# Altium PCB final test with protection.PcbDoc
Units mm, origin at the board's own origin, x right, y up, seen from the top; angles counter-clockwise.
Board outline 152.4 x 101.6 mm, 2 copper layers (Top Layer, Bottom Layer); 17 components, 18 nets, 72 pads, 0 vias.
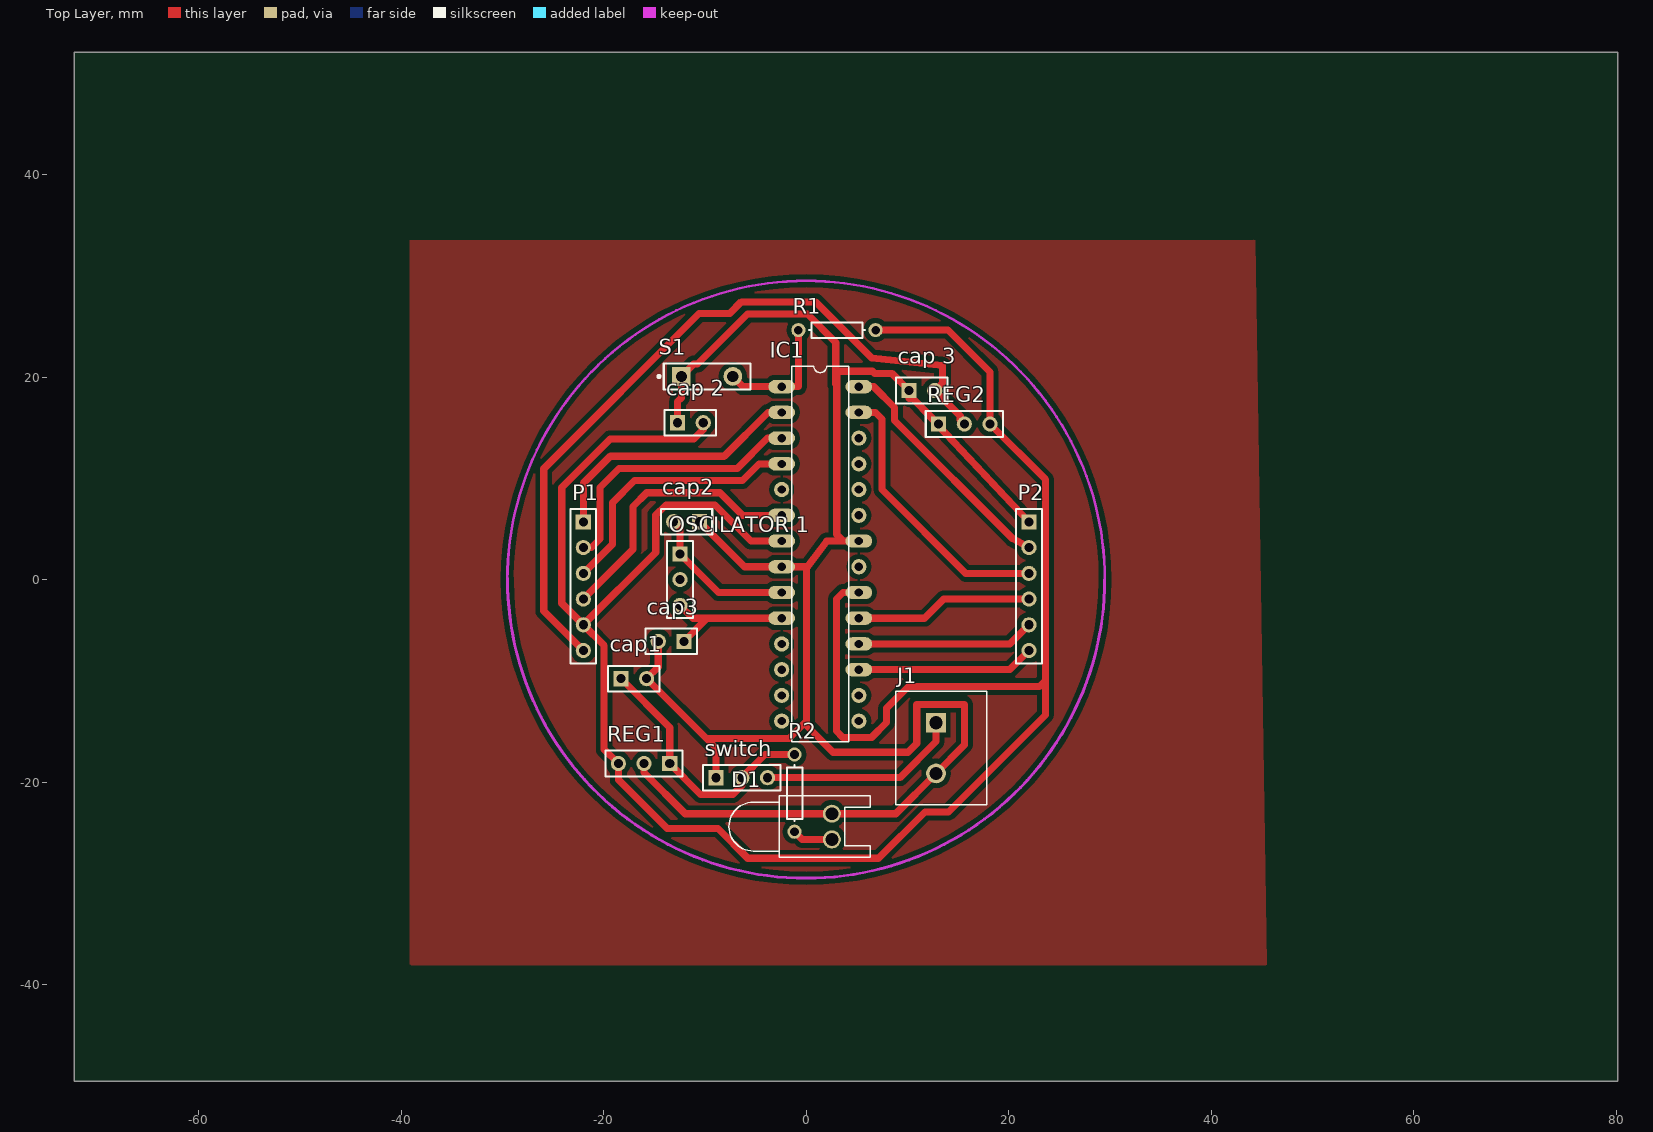
[diagram p0: Top Layer view]
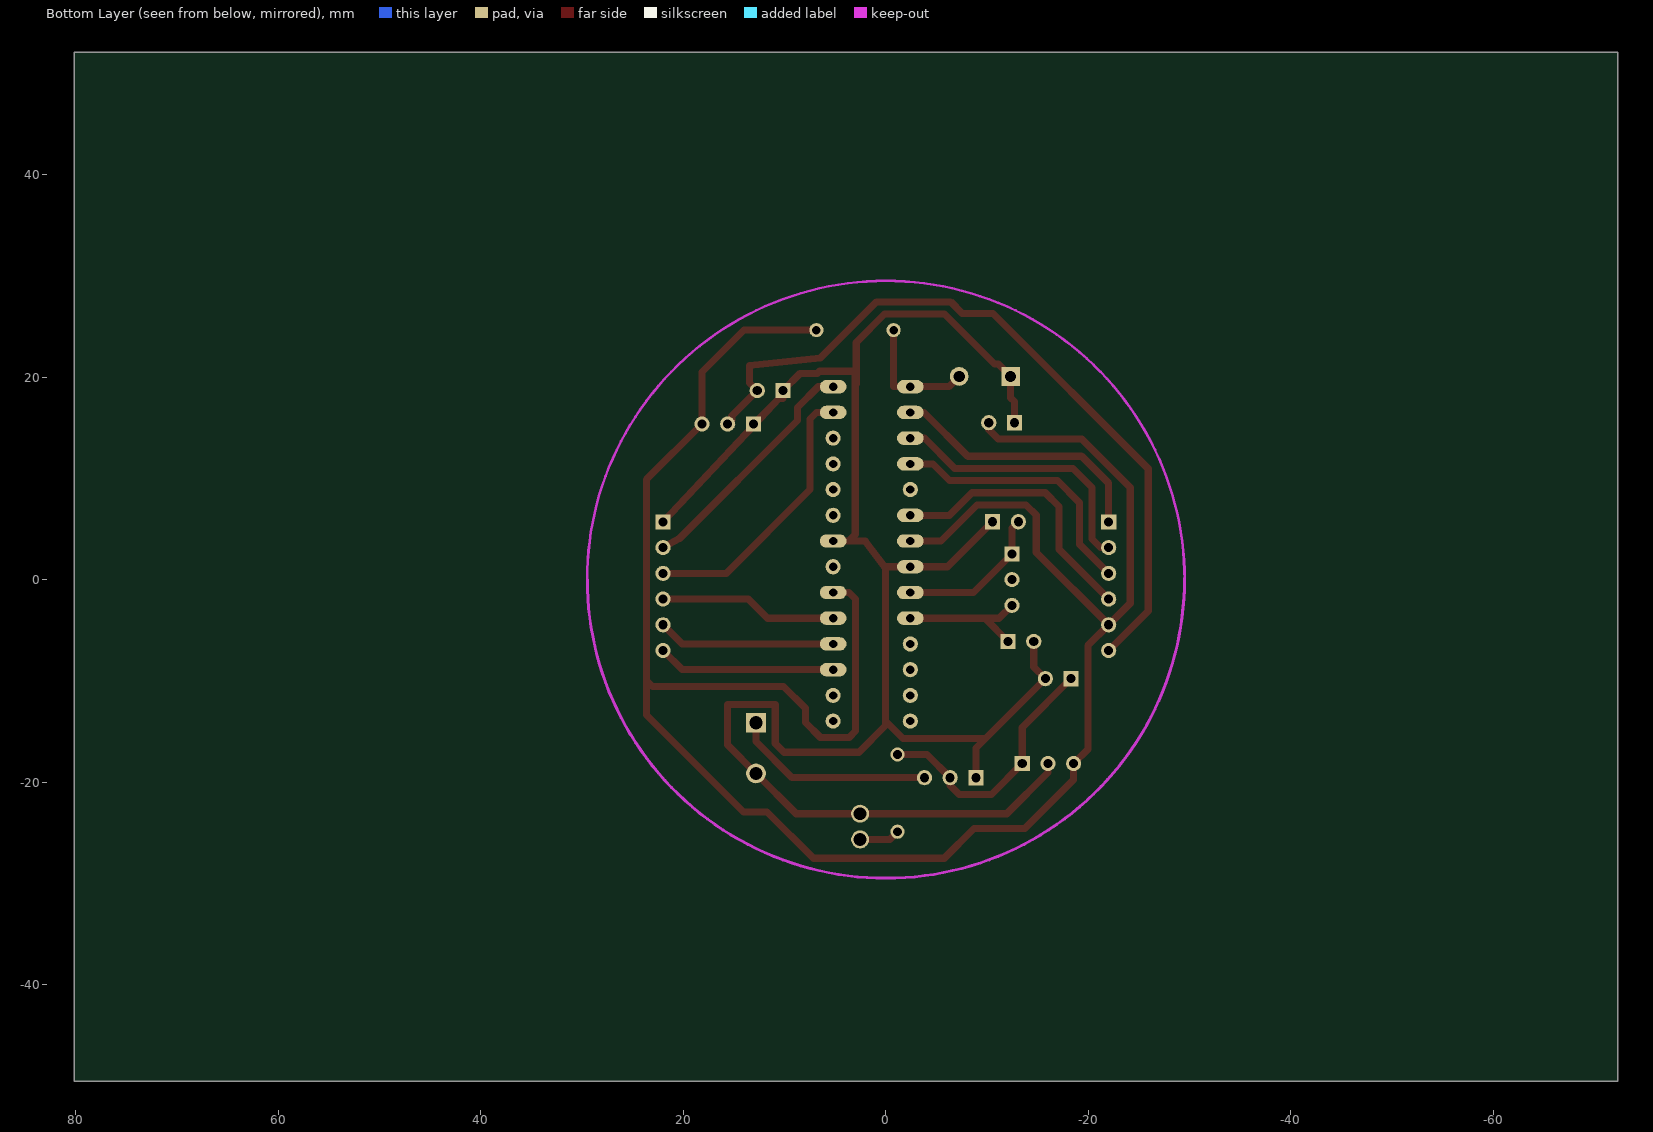
[diagram p1: Bottom Layer view, seen from below]

## Layer stack, top to bottom
Top Solder: solder mask 0.0102, Solder Resist, Dk 3.5
Top Layer: signal copper 0.0356
Dielectric 1: dielectric 0.32, FR-4, Dk 4.8
Bottom Layer: signal copper 0.0356
Bottom Solder: solder mask 0.0102, Solder Resist, Dk 3.5

## Board outline
-72.263,-49.53 80.137,-49.53 80.137,52.07 -72.263,52.07

## Design rules (kind name [scope] priority, off if disabled: settings)
Clearance [All] p1: gap=0.5 ignorepadtopadclearanceinfootprint=FALSE
PolygonConnect [All] p1: connectstyle=Relief reliefconductorwidth=0.254 reliefentries=4 polygonreliefangle="90 Angle" airgapwidth=0.254
RoutingLayers [All] p1: top layer_v5=TRUE bottom layer_v5=FALSE
RoutingVias [All] p1: holewidth=0.711 width=1.27 viastyle="Through Hole" minholewidth=0.711 minwidth=1.27 maxholewidth=0.711 maxwidth=1.27
SolderMaskExpansion [All] p1: expansion=0.102
Width [All] p1: maxlimit=1 minlimit=0.5 preferedwidth=0.7
29 further rules are at their usual default settings.

## Components (designator, comment, footprint, x,y, rotation, side; value= is the part's Value field where it differs from the comment)
cap1 "Header 2" HDR1X2 -18.288,-9.779 r0 top
cap2 "Header 2" HDR1X2 -10.541,5.715 r180 top
cap3 "Header 2" HDR1X2 -12.065,-6.096 r180 top
"cap 2" "Header 2" HDR1X2 -12.7,15.494 r0 top
"cap 3" "Header 2" HDR1X2 10.16,18.669 r0 top
D1 "LED0" LED-0 2.54,-24.384 r270 top
IC1 "ATMEGA328-PU" *DIL28 1.397,2.54 r0 top
J1 "OSTTA020161" *OST_OSTTA020161 12.827,-16.637 r270 top
"OSCILATOR 1" "Header 3" HDR1X3 -12.446,2.54 r270 top
P1 "Header 6" HDR1X6 -22,5.7 r270 top
P2 "Header 6" HDR1X6 22,5.7 r270 top
R1 "Res1" AXIAL-0.3 3.048,24.638 r0 top value=1K
R2 "Res1" AXIAL-0.3 -1.143,-21.082 r270 top value=1K
REG1 "Header 3" HDR1X3 -13.462,-18.161 r180 top
REG2 "Header 3" HDR1X3 13.081,15.367 r0 top
S1 "SW-PB" SPST-2 -9.779,20.066 r0 top
switch "Header 3" HDR1X3 -8.89,-19.558 r0 top

## Footprints (in the part's own frame and the unit in brackets; to place one, negate y for a bottom-side part, rotate by r counter-clockwise, add the part's x,y. Pads: shape width x height; smd on the part's side, far side on the other; paste and mask are expansions set on the pad)
*DIL28 [mil]
  oval 104x52 hole 32: 1(-150,650) 2(-150,550) 3(-150,450) 4(-150,350) 6(-150,150) 7(-150,50) 8(-150,-50) 9(-150,-150) 10(-150,-250) 17(150,-450) 18(150,-350) 19(150,-250) 20(150,-150) 22(150,50) 27(150,550) 28(150,650)
  round 59.06 hole 32: 5(-150,250) 11(-150,-350) 12(-150,-450) 13(-150,-550) 14(-150,-650) 15(150,-650) 16(150,-550) 21(150,-50) 23(150,150) 24(150,250) 25(150,350) 26(150,450)
  silkscreen extent -110,-730 110,730
*OST_OSTTA020161 [mm]
  rect 1.95x1.95 hole 1.3: 1(-2.5,0)
  round 1.95 hole 1.3: 2(2.5,0)
  silkscreen extent -5.6,-4 5.6,5
AXIAL-0.3 [mm] "Axial Device, Thru-Hole; 2 Leads; 0.3 in Pin Spacing"
  round 1.4 hole 0.85: 1(-3.81,0) 2(3.81,0)
  silkscreen extent -2.77,-0.76 2.77,0.76
HDR1X2 [mm] "Connector; Header; 2 Position"
  rect 1.5x1.5 hole 0.9: 1(0,0)
  round 1.5 hole 0.9: 2(2.54,0)
  silkscreen extent -1.27,-1.27 3.81,1.27
HDR1X3 [mm] "Connector; Header; 3 Position"
  rect 1.5x1.5 hole 0.9: 1(0,0)
  round 1.5 hole 0.9: 2(2.54,0) 3(5.08,0)
  silkscreen extent -1.27,-1.27 6.35,1.27
HDR1X6 [mm] "Connector; Header; 6 Position"
  rect 1.5x1.5 hole 0.9: 1(0,0)
  round 1.5 hole 0.9: 2(2.54,0) 3(5.08,0) 4(7.62,0) 5(10.16,0) 6(12.7,0)
  silkscreen extent -1.27,-1.27 13.97,1.27
LED-0 [mil] "LED; 2 Leads"
  round 70 hole 50: 1(50,0) 2(-50,0)
  silkscreen extent -120,-400 120,150
SPST-2 [mm] "Switch; 2 Leads"
  rect 1.85x1.85 hole 1.1: 1(-2.54,0)
  round 1.85 hole 1.1: 2(2.54,0)
  silkscreen extent -4.89,-1.27 4.28,1.27

## Part data
cap1 cap2 cap3 "cap 2" "cap 3": "Header, 2-Pin", LatestRevisionDate=17-Jul-2002, LatestRevisionNote="Re-released for DXP Platform.", Publisher="Altium Limited"
D1: "Typical INFRARED GaAs LED", LatestRevisionDate=08-Jul-2005, LatestRevisionNote="Mech Layer 1 removed.", PackageDescription="LED; 2 Leads", PackageReference=LED-0, Published=8-Jun-2000, Publisher="Altium Limited"
IC1: "ATmega Series 20 MHz 32 KB Flash 2 KB SRAM 8-Bit Microcontroller - DIP-28", Package="PDIP-28 Microchip", Availability=Unavailable, MF=Microchip, MP=ATMEGA328-PU, Price=None, SnapEDA_Link=https://www.snapeda.com/parts/ATMEGA328-PU/Microchip/view-part/?ref=snap
J1: "Connector Terminal Blocks 2 Position 5mm Solder Straight Thru-Hole 16A", Package=None, Availability=Unavailable, MF="On Shore", MP=OSTTA020161, Price=None, SnapEDA_Link=https://www.snapeda.com/parts/OSTTA020161/On%20Shore%20Technology%20Inc./view-part/?ref=snap
"OSCILATOR 1" REG1 REG2 switch: "Header, 3-Pin", LatestRevisionDate=17-Jul-2002, LatestRevisionNote="Re-released for DXP Platform.", Publisher="Altium Limited"
P1 P2: "Header, 6-Pin", LatestRevisionDate=17-Jul-2002, LatestRevisionNote="Re-released for DXP Platform.", Publisher="Altium Limited"
R1 R2: "Resistor", LatestRevisionDate=17-Jul-2002, LatestRevisionNote="Re-released for DXP Platform.", PackageDescription="Axial Device, Thru-Hole; 2 Leads; 0.3 in Pin Spacing", PackageReference=AXIAL-0.3, Published=8-Jun-2000, Publisher="Altium Limited"
S1: "Switch", LatestRevisionDate=17-Jul-2002, LatestRevisionNote="Re-released for DXP Platform.", PackageDescription="Switch; 2 Leads", PackageReference=SPST-2, Published=24-Mar-1999, Publisher="Altium Limited"

## Nets (pads, with @x,y where several pads share a name; then routed paths per layer and width w, separated by ;. In a path a pad name is that pad's centre, name@x,y a point inside that pad or via, vN(x,y) a via of type N, cw(c..) or ccw(c..) an arc to the next point about the centre after c; other vN are vias at no path point)
"3.3 volt": "cap 3.2" P1.6 REG2.2 | length 75.4
  Top Layer w0.7: P1.6 -25.908,-3.092 -25.908,10.947 -10.566,26.289 -7.544,26.289 -6.401,27.432 0.94,27.432 6.477,21.895 13.462,21.158 13.462,19.431 12.7,18.669 15.215,16.154 15.215,15.773 REG2.2
"5 volt": "cap 2.2" IC1.7 IC1.20 P1.5 R1.2 REG1.3 REG2.3 | length 216.2
  Top Layer w0.7: -10.16,15.494 -10.16,14.834 -11.1,13.894 -19.348,13.894 -24.13,9.112 -24.13,-2.33 P1.5 ; IC1.7 -5.436,3.81 -9.005,7.38 -13.843,7.38 -14.851,6.371 -14.851,2.689 P1.5 ; IC1.20 3.632,-1.27 2.997,-1.905 2.997,-14.961 3.607,-15.57 6.477,-15.57 7.942,-14.105 7.942,-12.7 10.101,-10.541 23.05,-10.541 23.622,-9.969 ; R1.2 14.021,24.638 18.161,20.498 REG2.3 23.622,9.906 23.622,-9.969 ; P1.5 -19.939,-6.521 -19.939,-16.764 REG1.3 -18.542,-19.761 -13.716,-24.587 -8.687,-24.587 -5.766,-27.508 7.163,-27.508 11.735,-22.936 14.046,-22.936 23.622,-13.36 23.622,-9.969
BATTERY: J1.1 switch.3 | length 20
  Top Layer w0.7: switch.3 9.255,-19.558 12.827,-15.986 J1.1
CS: IC1.6 P1.4 | length 27.3
  Top Layer w0.7: P1.4 -17.081,2.999 -17.081,7.233 -15.734,8.58 -8.503,8.58 -6.274,6.35 IC1.6
GND: "cap 2.1" "cap 3.1" cap1.2 cap2.1 cap3.2 D1.2 IC1.8 IC1.22 J1.2 P2.1 REG1.2 REG2.1 S1.1 switch.1 | length 198.8
  Top Layer w0.7: REG1.2 -16.002,-19.05 -11.938,-23.114 D1.2 8.85,-23.114 J1.2 15.621,-16.343 15.621,-12.312 10.922,-12.312 10.922,-16.18 10.058,-17.043 2.667,-17.043 0.025,-14.402 0.025,-13.97 ; cap3.2 -14.605,-8.636 cap1.2 -9.83,-15.697 ; -12.7,15.494 -12.7,17.577 -12.319,17.958 S1.1 -11.102,21.283 -10.715,21.283 -5.785,26.213 0.127,26.213 2.921,23.419 2.921,19.304 ; cap2.1 -6.096,1.27 IC1.8 0.025,1.27 ; switch.1 -8.89,-16.637 -9.83,-15.697 ; IC1.22 3.658,3.81 ; REG2.1 10.556,17.892 ; P2.1 12.999,15.29 10.556,17.892 ; -9.83,-15.697 -1.702,-15.697 0.025,-13.97 ; 0.025,-13.97 0.025,1.27 ; 0.025,1.27 0.127,1.27 2.032,3.81 3.658,3.81 ; 3.658,3.81 3.023,4.445 3.023,20.345 3.251,20.574 6.544,20.574 6.747,20.371 8.458,20.371 10.16,18.669 ; 10.16,18.669 10.556,17.892 ; 10.16,18.669 10.16,17.892 10.556,17.892
INT: IC1.4 P1.3 | length 26.5
  Top Layer w0.7: P1.3 -19.124,3.496 -19.124,7.59 -16.934,9.78 -6.299,9.78 -4.648,11.43 IC1.4
MISO: IC1.18 P2.5 | length 17.6
  Top Layer w0.7: IC1.18 20.11,-6.35 P2.5
MOSI: IC1.17 P2.6 | length 17.6
  Top Layer w0.7: IC1.17 20.11,-8.89 P2.6
NetD1_1: D1.1 R2.2 | length 4
  Top Layer w0.7: R2.2 -0.381,-25.654 D1.1
"OSCILATOR 1": "OSCILATOR 1.1" cap2.2 IC1.9 | length 15
  Top Layer w0.7: cap2.2 -12.446,5.08 -12.446,2.54 -8.636,-1.27 IC1.9
"OSCILATOR 2": "OSCILATOR 1.3" cap3.1 IC1.10 | length 13.8
  Top Layer w0.7: -12.446,-2.54 -11.176,-3.81 -9.779,-3.81 ; cap3.1 -9.779,-3.81 ; IC1.10 -9.779,-3.81
RESET: IC1.1 R1.1 S1.2 | length 12.5
  Top Layer w0.7: S1.2 -6.223,19.05 IC1.1 -0.762,19.05 R1.1
RX: IC1.2 P1.1 | length 26.3
  Top Layer w0.7: P1.1 -22,9.514 -19.334,12.18 -8.09,12.18 -3.759,16.51 IC1.2
SCK: IC1.19 P2.4 | length 17.6
  Top Layer w0.7: IC1.19 11.699,-3.81 13.589,-1.92 P2.4
SCL: IC1.28 P2.2 | length 24
  Top Layer w0.7: IC1.28 6.674,19.05 8.737,16.987 8.737,15.699 20.348,4.089 P2.2
SDA: IC1.27 P2.3 | length 27.5
  Top Layer w0.7: IC1.27 6.858,16.51 7.493,15.875 7.493,8.89 15.763,0.62 P2.3
"Switch out": cap1.1 R2.1 REG1.1 switch.2 | length 26
  Top Layer w0.7: cap1.1 -13.462,-14.605 REG1.1 -10.414,-21.209 -7.239,-21.209 -6.35,-20.32 switch.2 -4.064,-17.272 R2.1
TX: IC1.3 P1.2 | length 27
  Top Layer w0.7: P1.2 -21.209,3.16 -20.348,4.021 -20.348,9.097 -18.465,10.98 -6.8,10.98 -3.81,13.97 IC1.3
pads on no net: "OSCILATOR 1.2" IC1.5 IC1.11 IC1.12 IC1.13 IC1.14 IC1.15 IC1.16 IC1.21 IC1.23 IC1.24 IC1.25 IC1.26

## Polygon pours and split planes (outlines as drawn)
no net on Top Layer (solid, pour order 8): 44.323,33.655 44.196,33.528 -39.116,33.528 -39.116,-37.973 -38.989,-38.1 45.466,-38.1

## Keep-outs
Keep-Out Layer:
  circle w0.254: c0,0 r29.5
  lines w0.254: -29.464,0.132 ccw(c0,0) 29.464,0.006